# Altium PCB PCB1.PcbDoc
Units mil, origin at the board's own origin, x right, y up, seen from the top; angles counter-clockwise.
Board outline 2570 x 3900 mil, 2 copper layers (Top Layer, Bottom Layer); 48 components, 43 nets, 193 pads, 0 vias.
Unrouted connection lines stored in the file: 104.
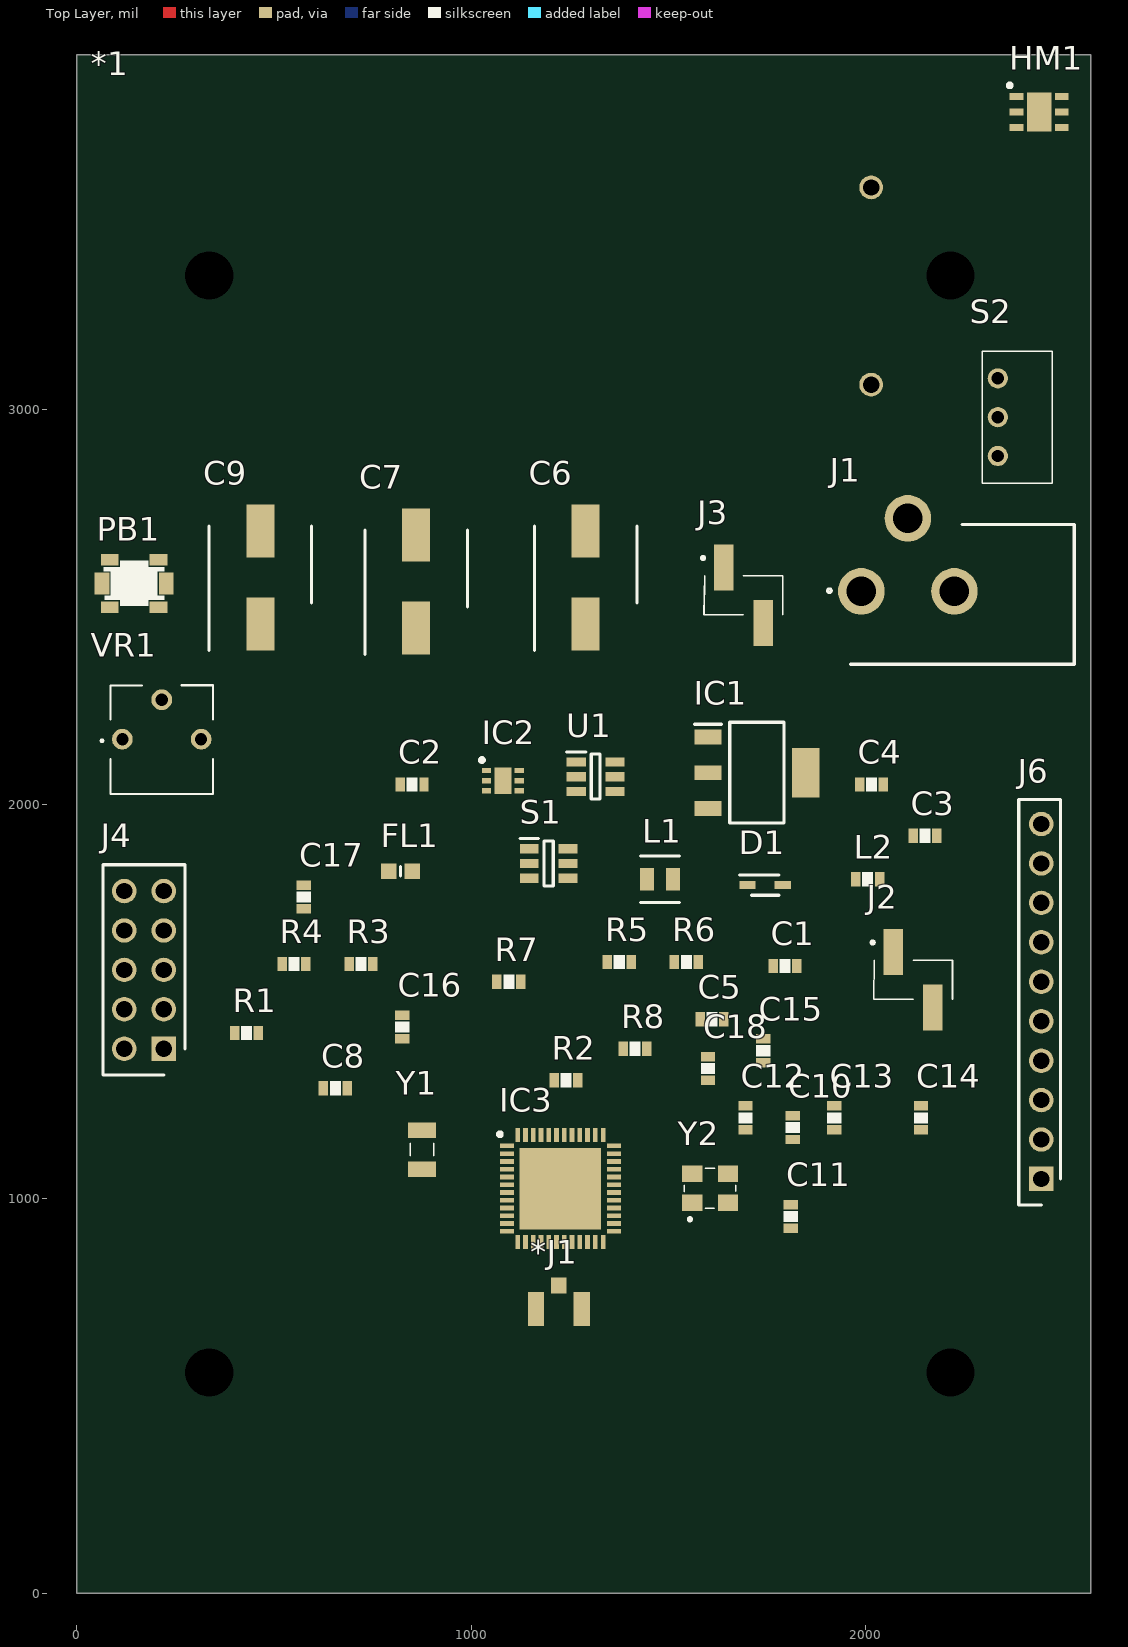
[diagram p0: Top Layer view]
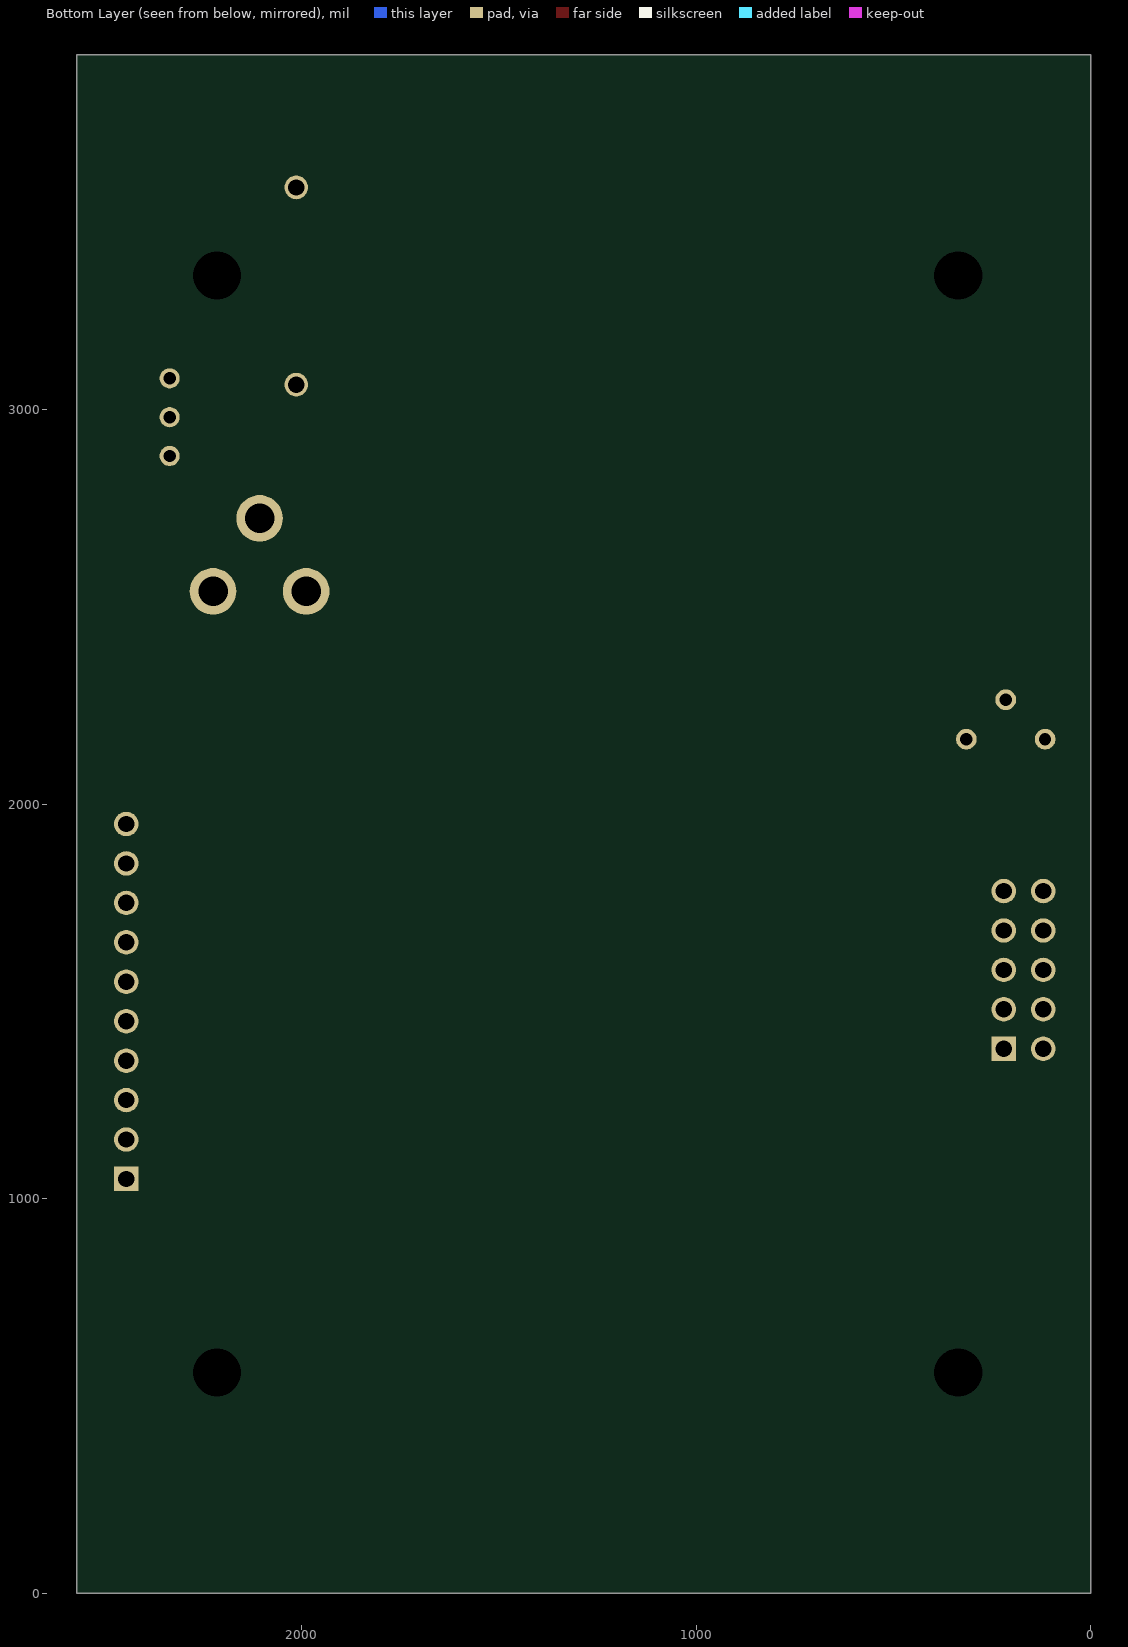
[diagram p1: Bottom Layer view, seen from below]

## Layer stack, top to bottom
Top Solder: solder mask 0.4, Solder Resist, Dk 3.5
Top Layer: signal copper 1.4
Dielectric 1: dielectric 12.6, FR-4, Dk 4.8
Bottom Layer: signal copper 1.4
Bottom Solder: solder mask 0.4, Solder Resist, Dk 3.5

## Board outline
0,0 2570,0 2570,3900 0,3900

## Design rules (kind name [scope] priority, off if disabled: settings)
Clearance [All] p1: gap=10 ignorepadtopadclearanceinfootprint=FALSE except(0: Arc-Hole Track-Hole SMDPad-Hole THPad-Hole Via-Hole Fill-Hole Poly-Hole Region-Hole Text-Hole)
PolygonConnect [All] p1: connectstyle=Relief reliefconductorwidth=10 reliefentries=4 polygonreliefangle="90 Angle" airgapwidth=10
RoutingVias [All] p1: holewidth=28 width=50 viastyle="Through Hole" minholewidth=28 minwidth=50 maxholewidth=28 maxwidth=50
SolderMaskExpansion [All] p1: expansion=4
Width [All] p1: maxlimit=10 minlimit=10 preferedwidth=10
30 further rules are at their usual default settings.

## Classes and differential pairs
component class Sheet2.SchDoc: *J1 C12 C13 C14 C15 C16 C17 C18 HM1 IC3 J6 L2 PB1 R5 R6 R7 R8 Y1 Y2
component class Sheet1: *1 C1 C2 C3 C4 C5 C6 C7 C8 C9 C10 C11 D1 FL1 IC1 IC2 J1 J2 J3 L1 R1 R2 R3 R4 S1 S2 U1 VR1

## Components (designator, comment, footprint, x,y, rotation, side; value= is the part's Value field where it differs from the comment)
*1 "BHAAA2468" BHAAA2468 30,2830 r0 top
*J1 "UFL_Connector" UFL_Connector 1300.67,800.71 r180 top
C1 "Passive-Capacitor (Generic)" PASSIVE-CAPACITOR-0603 1795,1590 r0 top value=0.1uF
C2 "Passive-Capacitor (Generic)" PASSIVE-CAPACITOR-0603 850,2050 r0 top value=0.1uF
C3 "Passive-Capacitor (Generic)" PASSIVE-CAPACITOR-0603 2150,1920 r0 top value=0.1uF
C4 "" PASSIVE-CAPACITOR-0603 2015,2050 r0 top value=22uF
C5 "Passive-Capacitor (Generic)" PASSIVE-CAPACITOR-0603 1610,1455 r0 top value=0.1uF
C6 "EEE-FK1E330P" CAPAE660X610N 1290,2575 r90 top
C7 "EEE-FK1E330P" CAPAE660X610N 860,2565 r90 top
C8 "Passive-Capacitor (Generic)" PASSIVE-CAPACITOR-0603 655,1280 r0 top value=10uF
C9 "EEE-HC1C101XP" CAPAE660X800N 465,2575 r90 top
C10 "Passive-Capacitor (Generic)" PASSIVE-CAPACITOR-0603 1815,1180 r90 top value=10uF
C11 "Passive-Capacitor (Generic)" PASSIVE-CAPACITOR-0603 1810,955 r90 top value=0.1uF
C12 "" PASSIVE-CAPACITOR-0603 1695,1205 r90 top value=22uF
C13 "Passive-Capacitor (Generic)" PASSIVE-CAPACITOR-0603 1920,1205 r90 top value=0.1uF
C14 "Passive-Capacitor (Generic)" PASSIVE-CAPACITOR-0603 2140,1205 r90 top value=0.1uF
C15 "Passive-Capacitor (Generic)" PASSIVE-CAPACITOR-0603 1740,1375 r90 top value=12pF
C16 "Passive-Capacitor (Generic)" PASSIVE-CAPACITOR-0603 825,1435 r90 top value=12pF
C17 "Passive-Capacitor (Generic)" PASSIVE-CAPACITOR-0603 575,1765 r90 top value=0.1uF
C18 "Passive-Capacitor (Generic)" PASSIVE-CAPACITOR-0603 1600,1330 r90 top value=1uF
D1 "1SS315TPH3F" SOD2513X110N 1745,1795 r0 top
FL1 "BLM18HE152SN1B" BEADC1608X95N 820.47,1830 r0 top
HM1 "HDC1080DMBT" SON100P300X300X80-7N 2440,3755 r0 top
IC1 "LM3940IMP-3.3_NOPB" SOT230P700X180-4N 1724.02,2080 r0 top
IC2 "TPS61291DRVT" SON65P200X200X80-7N 1080,2060 r0 top
IC3 "XCC1352R1F3RGZR" QFN50P700X700X100-49N-D 1225.83,1025.47 r0 top
J1 "PJ-102A" PJ-102AH 2106.89,2709.29 r270 top
J2 "87898-0204" 878980204 2120,1555 r0 top
J3 "87898-0204" 878980204 1690,2530 r0 top
J4 "PPTC052LFBN-RC" SHDR10W87P254_2X5_1320X508X870P 220,1380 r90 top
J6 "61301011821" SHDR10W87P0X254_1X10_2590X250X865P 2445,1050 r90 top
L1 "VLF302515MT-3R3M" VLF302515MT 1478.46,1810 r0 top
L2 "Passive-Inductor (Generic)" PASSIVE-INDUCTOR-0603 2005,1810 r0 top value=6.8uH
PB1 "Interface-Push-Button" INTERFACE-PUSH-BUTTON 145,2560 r0 top value=Single
R1 "Passive-Resistor (Generic)" PASSIVE-RESISTOR-0603 430,1420 r0 top value=10k
R2 "Passive-Resistor (Generic)" PASSIVE-RESISTOR-0603 1240,1300 r0 top value=0
R3 "Passive-Resistor (Generic)" PASSIVE-RESISTOR-0603 720,1595 r0 top value=0
R4 "Passive-Resistor (Generic)" PASSIVE-RESISTOR-0603 550,1595 r0 top value=0
R5 "Passive-Resistor (Generic)" PASSIVE-RESISTOR-0603 1375,1600 r0 top value=4.7k
R6 "Passive-Resistor (Generic)" PASSIVE-RESISTOR-0603 1545,1600 r0 top value=4.7k
R7 "Passive-Resistor (Generic)" PASSIVE-RESISTOR-0603 1095,1550 r0 top value=100k
R8 "Passive-Resistor (Generic)" PASSIVE-RESISTOR-0603 1415,1380 r0 top value=1k
S1 "TPS22860DBVR" SOT95P280X145-6N 1195.79,1850 r0 top
S2 "MHSS1105" MHSS1105 2384.21,2981.57 r180 top
U1 "TPL5111DDCR" SOT95P280X110-6N 1315,2070 r0 top
VR1 "3362P-1-101LF" 3362P1101LF 115,2165 r0 top
Y1 "FC-135_32.7680KA-AG0" FC135327680KAAG0 875,1124.21 r90 top
Y2 "CX2016DB48000C0FPLC1" CX2016DB48000C0FPLC1 1605.28,1026.42 r0 top

## Footprints (in the part's own frame and the unit in brackets; to place one, negate y for a bottom-side part, rotate by r counter-clockwise, add the part's x,y. Pads: shape width x height; smd on the part's side, far side on the other; paste and mask are expansions set on the pad)
3362P1101LF [mm]
  round 1.337 hole 0.78: 1(0,0) 2(2.54,2.54) 3(5.08,0)
  silkscreen extent -1.36,-3.53 5.84,3.5, body extent -0.76,-3.53 5.84,3.46, height 4.95
878980204 [mm]
  rect 1.27x2.96 smd: 1(-1.27,1.8) 2(1.27,-1.8)
  silkscreen extent -2.7,-1.25 2.54,2.5, body extent -2.54,-3.15 2.54,3.15, height 8.43
BEADC1608X95N [mm]
  rect 1x1 smd: 1(-0.75,0) 2(0.75,0)
  silkscreen extent 0,-0.3 0,0.3, body extent -0.8,-0.4 0.8,0.4, height 0.95
BHAAA2468 [mm] "AAA Battery Holder"
  round 1.524 hole 1.05: 1(50.39,18.645) 2(50.39,5.945)
  body extent 0.36,0.03 53.34,24.61, height 13.23
CAPAE660X610N [mm]
  rect 3.4x1.8 smd: 1(-3,0) 2(3,0)
  silkscreen extent -4.7,-3.3 3.3,3.3, body extent -3.9,-3.4 3.9,3.4, height 6.1
CAPAE660X800N [mm]
  rect 3.4x1.8 smd: 1(-3,0) 2(3,0)
  silkscreen extent -4.7,-3.3 3.3,3.3, body extent -3.9,-3.4 3.9,3.4, height 8
CX2016DB48000C0FPLC1 [mm]
  rect 1.3x1.05 smd: 1(-1.15,-0.925) 2(1.15,-0.925) 3(1.15,0.925) 4(-1.15,0.925)
  silkscreen extent -1.66,-2.1 1.66,1.3
FC135327680KAAG0 [mm]
  rect 1x1.8 smd: 1(-1.25,0) 2(1.25,0)
  silkscreen extent -0.4,-0.75 0.4,0.75
INTERFACE-PUSH-BUTTON [mm]
  rect 0.95x1.4 smd: 1(-2.075,0) 2(2.075,0)
  rect 1.15x0.75 smd: NC(-1.575,-1.525) NC(-1.575,1.525) NC(1.575,-1.525) NC(1.575,1.525)
  silkscreen extent -1.95,-1.45 1.95,1.45, body extent -2.21,-1.45 2.29,1.51, height 1.82
MHSS1105 [mm]
  round 1.3 hole 0.8: 1(1.25,2.5) 2(1.25,0) 3(1.25,-2.5)
  silkscreen extent -2.25,-4.25 2.25,4.25, body extent -2.25,-4.25 2.25,4.25, height 4
PASSIVE-CAPACITOR-0603 [mil]
  rect 24x36 smd: 1(-30,0) 2(30,0)
  silkscreen extent -14,-18 14,18, body extent -31,-20 31,20, height 28
PASSIVE-INDUCTOR-0603 [mil]
  rect 24x36 smd: 1(-30,0) 2(30,0)
  silkscreen extent -14,-18 14,18, body extent -31,-18 31,18, height 29
PASSIVE-RESISTOR-0603 [mil]
  rect 24x36 smd: 1(-30,0) 2(30,0)
  silkscreen extent -14,-18 14,18, body extent -31,-16 32,16, height 15
PJ-102AH [mm]
  round 3 hole 1.9: 1(4.3,-3) 2(4.3,3) 3(-0.4,0)
  silkscreen extent 0,-5.17 9,10.72, body extent -0.64,-3.64 8.76,10.76, height 10.85
QFN50P700X700X100-49N-D [mm]
  rect 0.9x0.3 smd: 1(-3.45,2.75) 2(-3.45,2.25) 3(-3.45,1.75) 4(-3.45,1.25) 5(-3.45,0.75) 6(-3.45,0.25) 7(-3.45,-0.25) 8(-3.45,-0.75) 9(-3.45,-1.25) 10(-3.45,-1.75) 11(-3.45,-2.25) 12(-3.45,-2.75) 25(3.45,-2.75) 26(3.45,-2.25) 27(3.45,-1.75) 28(3.45,-1.25) 29(3.45,-0.75) 30(3.45,-0.25) 31(3.45,0.25) 32(3.45,0.75) 33(3.45,1.25) 34(3.45,1.75) 35(3.45,2.25) 36(3.45,2.75)
  rect 0.3x0.9 smd: 13(-2.75,-3.45) 14(-2.25,-3.45) 15(-1.75,-3.45) 16(-1.25,-3.45) 17(-0.75,-3.45) 18(-0.25,-3.45) 19(0.25,-3.45) 20(0.75,-3.45) 21(1.25,-3.45) 22(1.75,-3.45) 23(2.25,-3.45) 24(2.75,-3.45) 37(2.75,3.45) 38(2.25,3.45) 39(1.75,3.45) 40(1.25,3.45) 41(0.75,3.45) 42(0.25,3.45) 43(-0.25,3.45) 44(-0.75,3.45) 45(-1.25,3.45) 46(-1.75,3.45) 47(-2.25,3.45) 48(-2.75,3.45)
  rect 5.25x5.25 smd: 49(0,0)
  silkscreen extent -4.02,3.38 -3.77,3.62, body extent -3.55,-3.55 3.55,3.55, height 1
SHDR10W87P0X254_1X10_2590X250X865P [mm]
  rect 1.575x1.575 hole 1.05: 1(0,0)
  round 1.575 hole 1.05: 2(2.54,0) 3(5.08,0) 4(7.62,0) 5(10.16,0) 6(12.7,0) 7(15.24,0) 8(17.78,0) 9(20.32,0) 10(22.86,0)
  silkscreen extent -1.67,-1.25 24.43,1.45, body extent -1.91,-1.52 24.77,1.78, height 11.02
SHDR10W87P254_2X5_1320X508X870P [mm]
  rect 1.575x1.575 hole 1.05: 1(0,0)
  round 1.575 hole 1.05: 2(0,2.54) 3(2.54,0) 4(2.54,2.54) 5(5.08,0) 6(5.08,2.54) 7(7.62,0) 8(7.62,2.54) 9(10.16,0) 10(10.16,2.54)
  silkscreen extent -1.7,-1.37 11.86,3.91, body extent -2.03,-1.84 12.19,4.32, height 11.02
SOD2513X110N [mm]
  rect 1.05x0.5 smd: 1(-1.138,0) 2(1.138,0)
  silkscreen extent -1.66,-0.65 0.87,0.65
SON65P200X200X80-7N [mm]
  rect 0.6x0.35 smd: 1(-1.05,0.65) 2(-1.05,0) 3(-1.05,-0.65) 4(1.05,-0.65) 5(1.05,0) 6(1.05,0.65)
  rect 1.1x1.7 smd: 7(0,0)
  silkscreen extent -1.47,1.2 -1.22,1.45, body extent -1.05,-1 1.05,1, height 0.8
SON100P300X300X80-7N [mm]
  rect 0.9x0.45 smd: 1(-1.45,1) 2(-1.45,0) 3(-1.45,-1) 4(1.45,-1) 5(1.45,0) 6(1.45,1)
  rect 1.6x2.5 smd: 7(0,0)
  silkscreen extent -2.02,1.6 -1.77,1.85, body extent -1.55,-1.5 1.55,1.5, height 0.8
SOT95P280X110-6N [mm]
  rect 1.25x0.6 smd: 1(-1.25,0.95) 2(-1.25,0) 3(-1.25,-0.95) 4(1.25,-0.95) 5(1.25,0) 6(1.25,0.95)
  silkscreen extent -1.88,-1.45 0.28,1.6, body extent -1.4,-1.45 1.4,1.45, height 1.1
SOT95P280X145-6N [mm]
  rect 1.2x0.6 smd: 1(-1.25,0.95) 2(-1.25,0) 3(-1.25,-0.95) 4(1.25,-0.95) 5(1.25,0) 6(1.25,0.95)
  silkscreen extent -1.85,-1.45 0.3,1.6, body extent -1.4,-1.45 1.4,1.45, height 1.45
SOT230P700X180-4N [mm]
  rect 1.75x0.95 smd: 1(-3.15,2.3) 2(-3.15,0) 3(-3.15,-2.3)
  rect 1.75x3.2 smd: 4(3.15,0)
  silkscreen extent -4.03,-3.25 1.75,3.25, body extent -3.5,-3.25 3.5,3.25, height 1.8
UFL_Connector [mm] "CONN U.FL RCPT STR 50 OHM SMD"
  rect 1.05x2.2 smd: 1(0.525,2.05) 2(3.475,2.05)
  rect 1x1.05 smd: 3(2,0.525)
VLF302515MT [mm]
  rect 0.9x1.45 smd: 1(-0.85,0) 2(0.85,0)
  silkscreen extent -1.25,-1.5 1.25,1.5

## Part data
*J1: "CONN U.FL RCPT STR 50 OHM SMD"
C1 C2 C3 C5 C8 C10 C11 C13 C14 C15 C16 C17 C18: "Generic Capacitor", Category=Passive, Supplier 1=Mouser, Supplier 2=Digi-Key
C4 C12: library part "Passive-Capacitor (Generic)", "Generic Capacitor", Category=Passive, Supplier 1=Mouser, Supplier 2=Digi-Key
C6 C7: "Capacitor Polarised", Manufacturer_Name=Panasonic, Mouser Part Number=667-EEE-FK1E330P, Allied_Number=70258257, Allied Price/Stock=https://www.alliedelec.com/panasonic-eee-fk1e330p/70258257/, Datasheet Link=https://industrial.panasonic.com/cdbs/www-data/pdf/RDE0000/ABA0000C1181.pdf, Height=6.1mm, Manufacturer_Part_Number=EEE-FK1E330P, Mouser Price/Stock=https://www.mouser.com/Search/Refine.aspx?Keyword=667-EEE-FK1E330P
C9: "Capacitor Polarised", Manufacturer_Name=Panasonic, Mouser Part Number=667-EEE-HC1C101XP, Allied_Number=70258549, Allied Price/Stock=https://www.alliedelec.com/panasonic-eee-hc1c101xp/70258549/, Datasheet Link=http://industrial.panasonic.com/www-cgi/jvcr13pz.cgi?E+PZ+3+ABA0109+EEEHC1C101XP+7+WW, Height=8mm, Manufacturer_Part_Number=EEE-HC1C101XP, Mouser Price/Stock=https://www.mouser.com/Search/Refine.aspx?Keyword=667-EEE-HC1C101XP
D1: "Schottky Diode", Manufacturer_Name=Toshiba, Mouser Part Number=757-1SS315TPH3F, Datasheet Link=http://toshiba.semicon-storage.com/info/docget.jsp?did=2666&prodName=1SS315, Height=1.1mm, Manufacturer_Part_Number=1SS315TPH3F, Mouser Price/Stock=https://www.mouser.com/Search/Refine.aspx?Keyword=757-1SS315TPH3F
FL1: "Filter", Manufacturer_Name="Murata Electronics", Mouser Part Number=N/A, Datasheet Link=https://www.murata.com/en-us/products/productdetail?partno=BLM18HE152SN1%23, Height=0.95mm, Manufacturer_Part_Number=BLM18HE152SN1B, Mouser Price/Stock=https://www.mouser.com/Search/Refine.aspx?Keyword=N%2FA
HM1: "Hygrometer", Manufacturer_Name="Texas Instruments", Mouser Part Number=595-HDC1080DMBT, RS Part Number=1330170P, Datasheet Link=http://www.mouser.com/ds/2/405/hdc1080-844688.pdf, Height=0.8mm, Manufacturer_Part_Number=HDC1080DMBT, Mouser Price/Stock=https://www.mouser.com/Search/Refine.aspx?Keyword=595-HDC1080DMBT, RS Price/Stock=http://uk.rs-online.com/web/p/products/1330170P
IC1: "Integrated Circuit", Manufacturer_Name="Texas Instruments", Manufacturer_Part_Number=LM3940IMP-3.3/NOPB, Mouser Part Number=926-LM3940IMP3.3NOPB, RS Part Number=5361546P, Datasheet Link=http://www.ti.com/lit/ds/symlink/lm3940.pdf, Height=1.8mm, Mouser Price/Stock=https://www.mouser.com/Search/Refine.aspx?Keyword=926-LM3940IMP3.3NOPB, RS Price/Stock=http://uk.rs-online.com/web/p/products/5361546P
IC2: "Integrated Circuit", Manufacturer_Name="Texas Instruments", Mouser Part Number=595-TPS61291DRVT, RS Part Number=9143112P, Datasheet Link=http://uk.rs-online.com/web/p/products/9143112P, Height=0.8mm, Manufacturer_Part_Number=TPS61291DRVT, Mouser Price/Stock=https://www.mouser.com/Search/Refine.aspx?Keyword=595-TPS61291DRVT, RS Price/Stock=http://uk.rs-online.com/web/p/products/9143112P
IC3: "Integrated Circuit", Manufacturer_Name="Texas Instruments", Datasheet Link=http://www.ti.com/lit/gpn/cc1352r, Height=1mm, Manufacturer_Part_Number=XCC1352R1F3RGZR
J1: "Connector", Manufacturer_Name=CUI, Mouser Part Number=490-PJ-102A, Datasheet Link=https://www.cui.com/product/resource/pj-102a.pdf, Manufacturer_Part_Number=PJ-102A, Mouser Price/Stock=https://www.mouser.com/Search/Refine.aspx?Keyword=490-PJ-102A
J2 J3: "Connector", Manufacturer_Name=Molex, Mouser Part Number=538-87898-0204, Allied_Number=70967354, Allied Price/Stock=https://www.alliedelec.com/molex-incorporated-87898-0204/70967354/, Datasheet Link=https://www.molex.com/pdm_docs/sd/878980204_sd.pdf, Height=8.33mm, Manufacturer_Part_Number=87898-0204, Mouser Price/Stock=https://www.mouser.com/Search/Refine.aspx?Keyword=538-87898-0204
J4: "Connector", Manufacturer_Name=Sullins, Datasheet Link=http://www.sullinscorp.com/drawings/78_P(N)PxCxxxLFBN-RC,_10492-H.pdf, Height=8.7mm, Manufacturer_Part_Number=PPTC052LFBN-RC
J6: "Connector", Manufacturer_Name="Wurth Elektronik", Mouser Part Number=710-61301011821, Datasheet Link=http://katalog.we-online.de/em/datasheet/6130xx11821.pdf, Height=8.65mm, Manufacturer_Part_Number=61301011821, Mouser Price/Stock=https://www.mouser.com/Search/Refine.aspx?Keyword=710-61301011821
L1: "Inductor", Manufacturer_Name=TDK, Mouser Part Number=810-VLF302515MT-3R3M, Datasheet Link=https://product.tdk.com/info/en/documents/wdcatalog/withdrawn_inductor_commercial_power_vlf302515mt_en.pdf, Manufacturer_Part_Number=VLF302515MT-3R3M, Mouser Price/Stock=https://www.mouser.com/Search/Refine.aspx?Keyword=810-VLF302515MT-3R3M
L2: "Generic Inductor", Category=Passive, Supplier 1=Mouser, Supplier 2=Digi-Key
PB1: "2.5mm Tall, 2.5N Force, Straight, SMD, Push Button", Manufacturer="C&K Components", Manufacturer Part Number="PTS820 J25K SMTR LFS", Package=SMD-6, Supplier Part Number 1=611-PTS820J25KSMTR, Category=Interface, ComponentLink1Description=Datasheet, ComponentLink1URL=https://www.mouser.com/datasheet/2/60/pts820-1382642.pdf, Supplier 1=Mouser, Supplier 2=Digi-Key, Supplier Part Number 2=CKN10897CT-ND, Through Hole (y/n)=N
R1 R2 R3 R4 R5 R6 R7 R8: "Generic Resistor", Category=Passive, Supplier 1=Mouser, Supplier 2=Digi-Key, Through Hole (y/n)=N
S1: "Switch", Manufacturer_Name="Texas Instruments", Mouser Part Number=595-TPS22860DBVR, Datasheet Link=http://www.ti.com/lit/gpn/tps22860, Height=1.45mm, Manufacturer_Part_Number=TPS22860DBVR, Mouser Price/Stock=https://www.mouser.com/Search/Refine.aspx?Keyword=595-TPS22860DBVR
S2: "Switch", Manufacturer_Name=Apem, Mouser Part Number=642-MHSS1105, Datasheet Link=https://componentsearchengine.com/Datasheets/2/MHSS1105.pdf, Height=4mm, Manufacturer_Part_Number=MHSS1105, Mouser Price/Stock=https://www.mouser.com/Search/Refine.aspx?Keyword=642-MHSS1105
U1: "Undefined or Miscellaneous", Manufacturer_Name="Texas Instruments", Mouser Part Number=595-TPL5111DDCR, Datasheet Link=http://www.ti.com/lit/ds/symlink/tpl5111.pdf, Height=1.1mm, Manufacturer_Part_Number=TPL5111DDCR, Mouser Price/Stock=https://www.mouser.com/Search/Refine.aspx?Keyword=595-TPL5111DDCR
VR1: "Variable Resistor", Manufacturer_Name=Bourns, Mouser Part Number=652-3362P-1-101LF, RS Part Number=5220877P, Allied_Number=70154047, Allied Price/Stock=https://www.alliedelec.com/bourns-3362p-1-101lf/70154047/, Datasheet Link=https://www.bourns.com/docs/Product-Datasheets/3362.pdf, Height=4.95mm, Manufacturer_Part_Number=3362P-1-101LF, Mouser Price/Stock=https://www.mouser.com/Search/Refine.aspx?Keyword=652-3362P-1-101LF, RS Price/Stock=http://uk.rs-online.com/web/p/products/5220877P
Y1: "Crystal or Oscillator", Manufacturer_Name="Epson Timing", Manufacturer_Part_Number="FC-135 32.7680KA-AG0", Mouser Part Number=732-FC135-32.76KAAG0, Datasheet Link=https://support.epson.biz/td/api/doc_check.php?dl=brief_FC-135&lang=en/.pdf, Height=0mm, Mouser Price/Stock=https://www.mouser.com/Search/Refine.aspx?Keyword=732-FC135-32.76KAAG0
Y2: "Crystal or Oscillator", Manufacturer_Name="Kyocera Electronic Components", Mouser Part Number=581-CX2016DB48CFPLC1, Datasheet Link=https://componentsearchengine.com/Datasheets/1/CX2016DB48000C0FPLC1.pdf, Manufacturer_Part_Number=CX2016DB48000C0FPLC1, Mouser Price/Stock=https://www.mouser.com/Search/Refine.aspx?Keyword=581-CX2016DB48CFPLC1

## Free pads (board coordinates)
  round 60 hole 122 unplated: 14(335.5,559.5) 14(335.5,3340.5) 14(2215,559.5) 14(2215,3340.5)

## Nets (pads, with @x,y where several pads share a name; then routed paths per layer and width w, separated by ;. In a path a pad name is that pad's centre, name@x,y a point inside that pad or via, vN(x,y) a via of type N, cw(c..) or ccw(c..) an arc to the next point about the centre after c; other vN are vias at no path point)
DCDC_SW: IC3.33 L2.1
DIO16_TDO: IC3.26
DIO17_TDI: IC3.40
DIO18_SWO: IC3.41
DONE: IC3.12 R1.2 U1.4
GND: *1.1 *J1.1 *J1.2 C1.1 C2.1 C3.1 C4.2 C5.1 C6.2 C7.2 C8.1 C9.2 C10.1 C11.1 C12.2 C13.1 C14.1 C15.1 C16.1 C17.2 C18.1 IC1.2 IC1.4 IC2.6 IC2.7 IC3.2 IC3.49 J1.2 J1.3 J6.7 R1.1 R3.2 R8.1 S1.2 U1.2 VR1.2 Y2.2 Y2.4
GPIO7_A_D: IC3.36 J6.1
GPIO8_A_D: IC3.37
GPIO9_A_D: IC3.38
GPIO10_A_D: IC3.39
GPIO11_A_D: IC3.42
GPIO12_A_D: IC3.43
hot1: IC3.47 Y2.1
hot2: IC3.46 Y2.3
I2C_SCL: IC3.9 J6.6 R5.1
I2C_SDA: IC3.10 J6.5 R6.1
JTAG_TCKC: IC3.25
JTAG_TMSC: IC3.24
Net*1_2: *1.2 D1.2
NetC6_1: C6.1 IC1.1 J1.1
NetC12_1: C12.1 C13.2 C14.2 L2.2
NetC15_2: C15.2 IC3.6 Y1.2
NetC16_2: C16.2 IC3.7 Y1.1
NetC18_2: C18.2 IC3.23
NetD1_1: D1.1 J3.1
NetIC2_4: IC2.4 R4.1
NetIC2_5: IC2.5 R3.1
NetPB1_1: PB1.1 R8.2
NetR2_1: R2.1 S1.6
NetU1_3: U1.3 VR1.3
RESET_N: C17.1 IC3.35 J6.8 PB1.2 R7.1
RF_P_2_4: *J1.3 IC3.1
TPL_DRV: R2.2 R4.2 U1.5
UART_RX: IC3.18 J6.3
UART_TX: IC3.19 J6.4
V_Barrel: C7.1 IC1.3 S2.3
V_L: IC2.1 L1.2
V_Select: FL1.1 J6.2 R5.2 R6.2 S2.2
V_Switch: J2.1 S1.1 S2.1
VCC3V3: C8.2 IC2.2 J2.2 S1.4 S1.5 U1.1 U1.6
VDDR: IC3.45 IC3.48
VDDS: C1.2 C2.2 C3.2 C4.1 C5.2 FL1.2 IC3.13 IC3.22 IC3.34 IC3.44 R7.2
Vin: C9.1 C10.2 C11.2 IC2.3 J3.2 L1.1
pads on no net: HM1.1 HM1.2 HM1.3 HM1.4 HM1.5 HM1.6 HM1.7 IC3.3 IC3.4 IC3.5 IC3.8 IC3.11 IC3.14 IC3.15 IC3.16 IC3.17 IC3.20 IC3.21 IC3.27 IC3.28 IC3.29 IC3.30 IC3.31 IC3.32 J4.1 J4.2 J4.3 J4.4 J4.5 J4.6 J4.7 J4.8 J4.9 J4.10 J6.9 J6.10 PB1.NC S1.3 VR1.1

## Silkscreen, mask and mechanical layers (free items; w line width, h text height)
Mechanical 1:
  the board outline again, w10